# Altium PCB electronic_dc_load_v2.PcbDoc (part 3 of 3)
Units mm, origin at the board's own origin, x right, y up, seen from the top; angles counter-clockwise.
Board outline 170 x 170 mm, 4 copper layers (Top Layer, Int1(GND), Int2, Bottom Layer(PWR)), stack 1.607 mm thick; 162 components, 115 nets, 479 pads, 0 vias.
Unrouted connection lines stored in the file: 311.
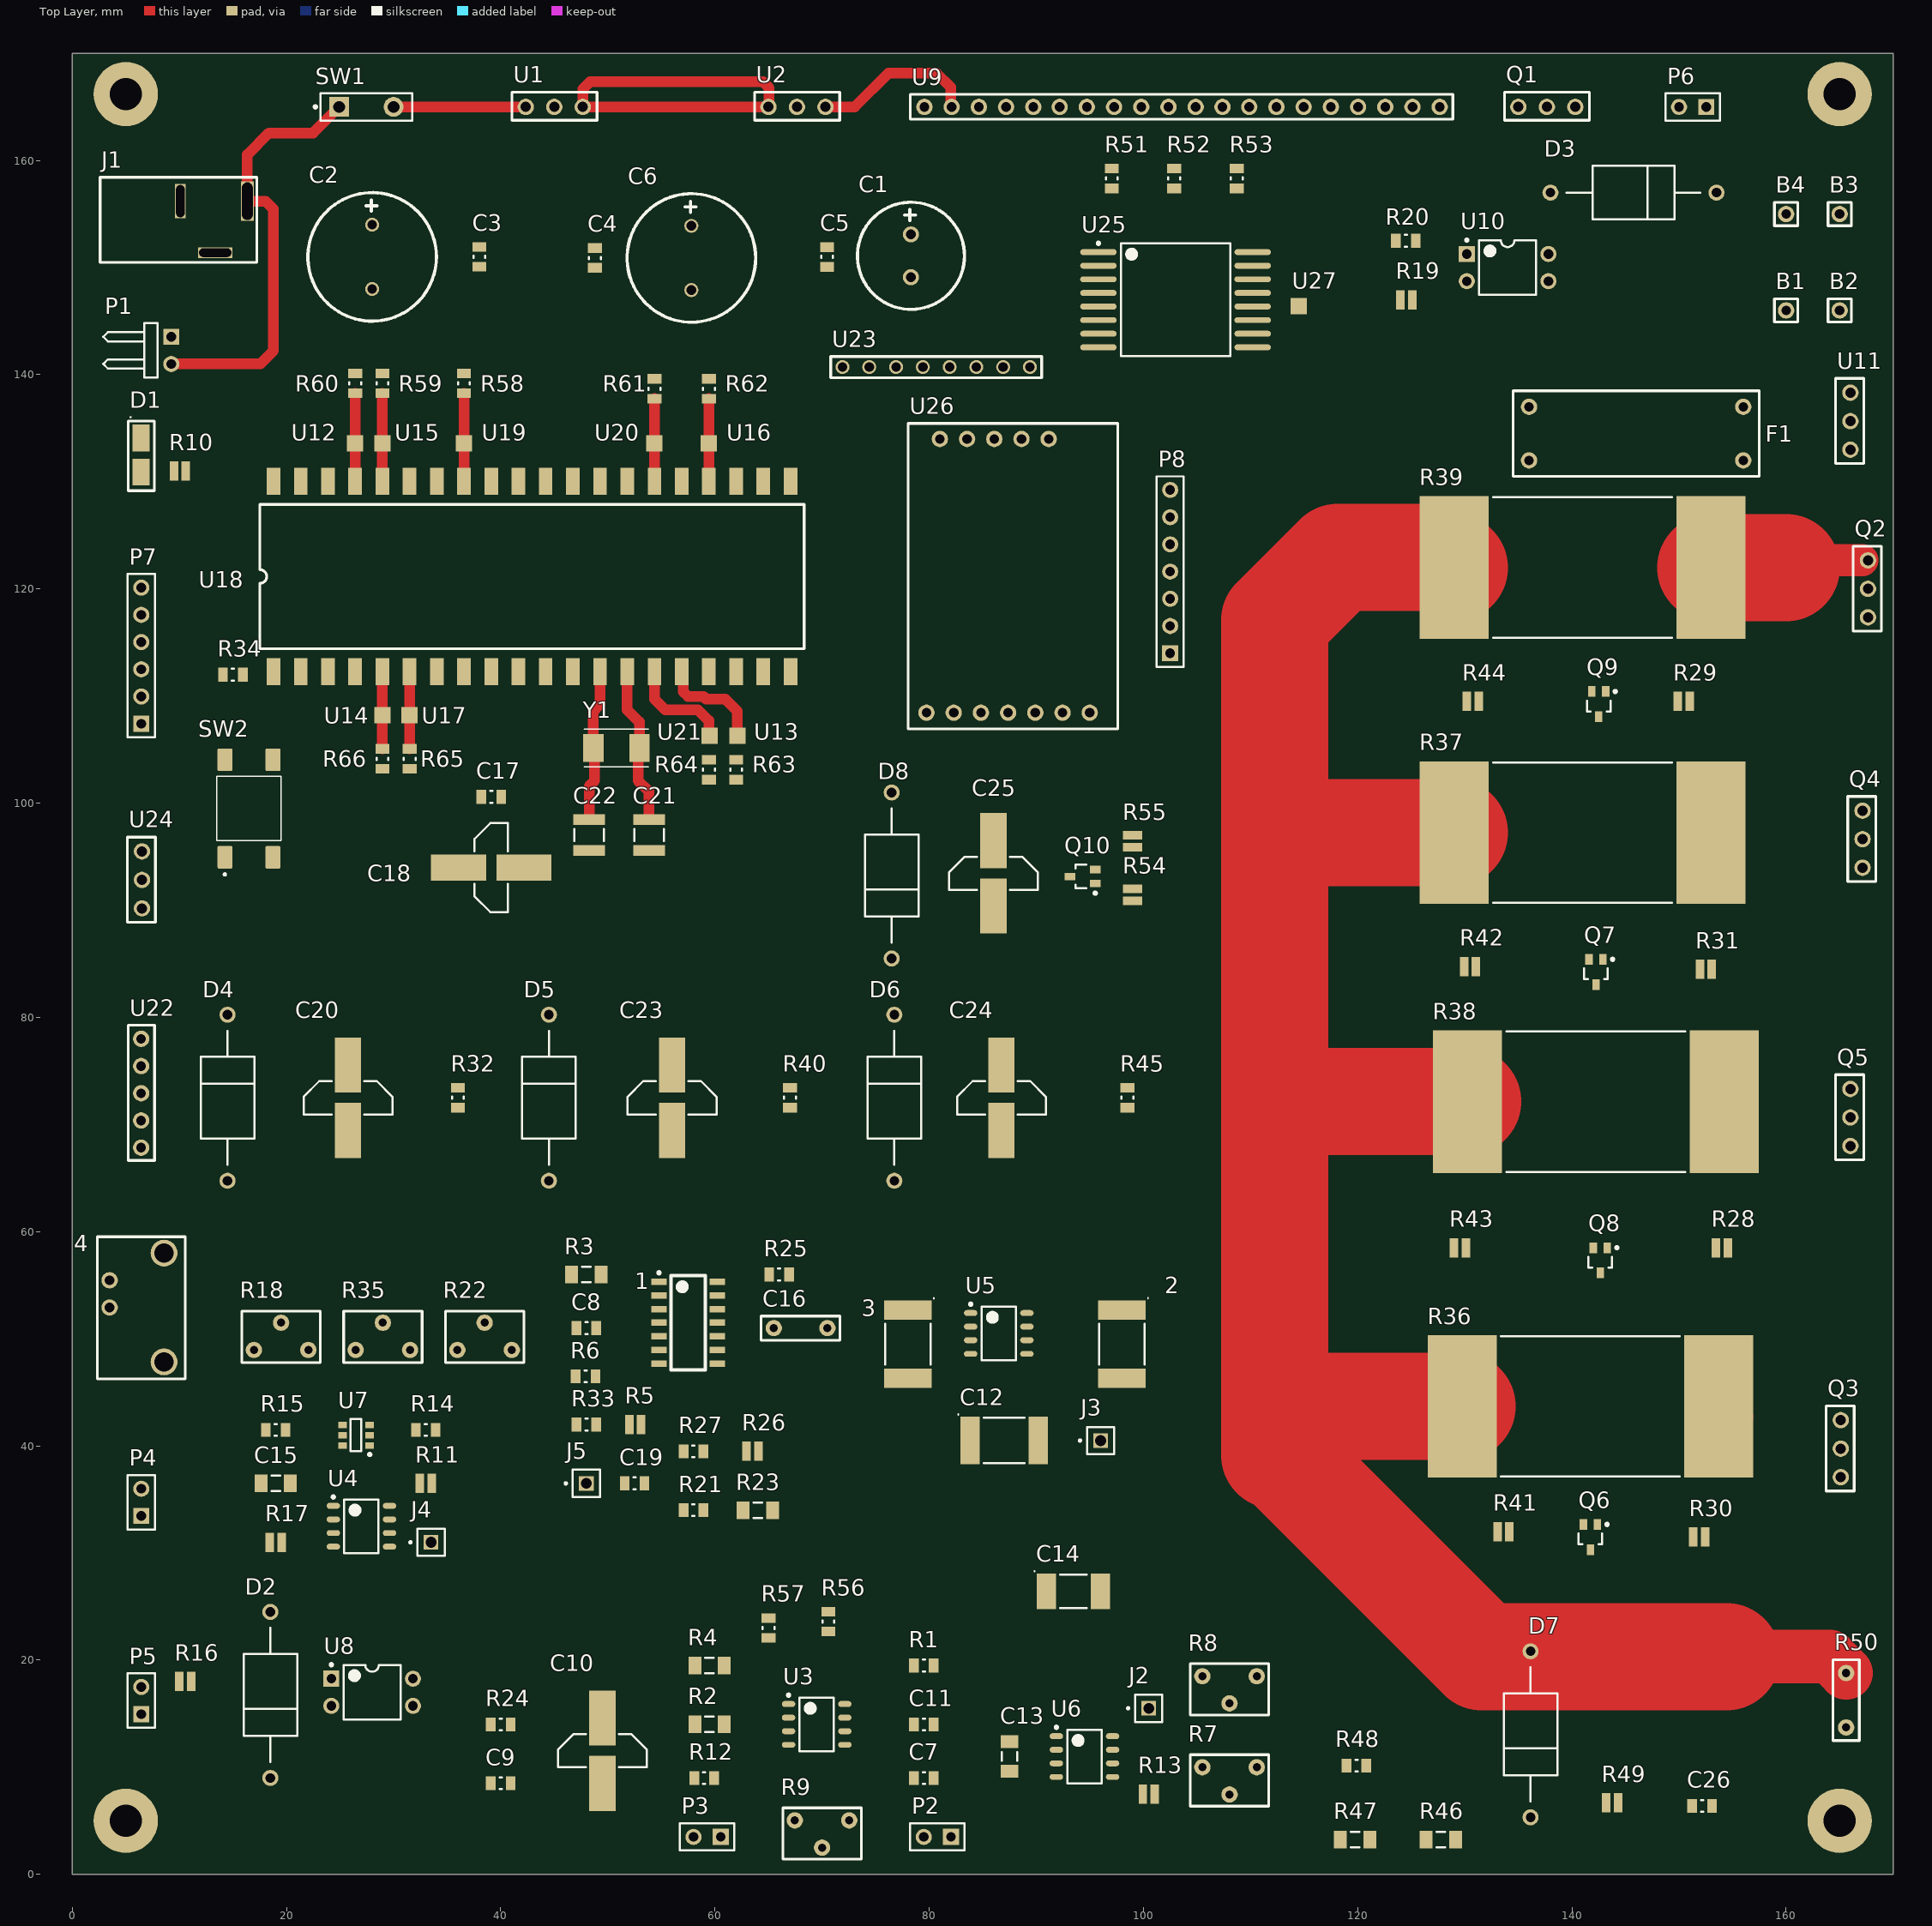
[diagram p0: Top Layer view]

## Nets (pads, with @x,y where several pads share a name; then routed paths per layer and width w, separated by ;. In a path a pad name is that pad's centre, name@x,y a point inside that pad or via, vN(x,y) a via of type N, cw(c..) or ccw(c..) an arc to the next point about the centre after c; other vN are vias at no path point) (continued)
NetQ3_3: (continued)
  Top Layer w5: R36.2 153.707,43.397 R36.2@154.432,42.672
NetQ4_1: Q4.1 Q7.3 R31.1
NetQ4_3: Q4.3 Q7.1 R37.2
NetQ5_1: Q5.1 Q8.3 R28.1
NetQ5_3: Q5.3 Q8.1 R38.2
NetQ6_2: Q6.2 R41.2
NetQ7_2: Q7.2 R42.2
NetQ8_2: Q8.2 R43.2
NetQ9_2: Q9.2 R44.2
NetQ10_2: Q10.2 R55.2
NetR1_1: R1.1 R56.2
NetR1_2: R1.2 R4.1 U3.2
NetR2_1: R2.1 R12.2 U3.3
NetR7_2: R7.2 R8.2 R13.2
NetR9_1: R9.1 U3.1
NetR9_3: R9.3 U3.8
NetR12_1: R12.1 R57.2
NetR13_1: R13.1 U6.5
NetR14_1: R14.1 U7.3 U7.6 U18.35
NetR19_1: R19.1 U10.4
NetR20_2: R20.2 U10.1
NetR22_2: R22.2 R23.1
NetR24_1: R24.1 U9.19
NetR26_2: R26.2 R28.2 R29.2 R30.2 R31.2
NetR27_1: R27.1 U18.34
NetR33_1: R33.1 R35.1
NetR46_2: R46.2 R47.1
NetR51_1: R51.1 U18.18 U25.14 U26.5
NetR52_1: R52.1 U18.23 U25.15 U26.4
NetR53_1: R53.1 U18.17 U25.13
NetU10_2: U10.2 U18.7
NetU18_10: U18.10 U24.2
NetU18_19: U18.19 U23.1
NetU18_20: U18.20 U23.2
NetU18_21: U18.21 U23.3
NetU18_22: U18.22 U23.4
NetU18_27: U18.27 U23.5
NetU18_28: U18.28 U23.6
NetU18_29: U18.29 U23.7
NetU18_30: U18.30 U23.8
NetU25_12: U25.12 U27.1
RS: U9.4 U25.4
RST: U9.17 U25.6
TP1: R66.1 U14.1 U18.5 | length 7.2
  Top Layer w1: R66.1 U14.1 U18.5
TP2: R65.1 U17.1 U18.6 | length 7.2
  Top Layer w1: R65.1 U17.1 U18.6
TP3: R64.1 U18.15 U21.1 | length 9.9
  Top Layer w1: U18.15 54.356,109.728 55.372,108.712 58.42,108.712 59.436,107.696 59.436,106.364 U21.1
TP4: R63.1 U13.1 U18.16 | length 10
  Top Layer w1: U18.16 57.031,112.133 57.031,110.417 57.482,109.966 58.939,109.966 59.177,109.728 60.96,109.728 62.1,108.588 U13.1
TP5: R62.1 U16.1 U18.24 | length 7.7
  Top Layer w1: U18.24 U16.1 R62.1
TP6: R61.1 U18.26 U20.1 | length 7.7
  Top Layer w1: U18.26 U20.1 R61.1
TP7: R60.1 U12.1 U18.37 | length 8.2
  Top Layer w1: U18.37 U12.1 R60.1
TP8: R59.1 U15.1 U18.36 | length 8.2
  Top Layer w1: U18.36 U15.1 R59.1
TP9: R58.1 U18.33 U19.1 | length 8.2
  Top Layer w1: U18.33 U19.1 R58.1
pads on no net: 1.8 1.9 1.10 4.3 4.4 U3.5 U4.4 U4.5 U5.1 U5.6 U6.1 U6.3 U6.7 U6.8 U9.3 U9.16 U9.18 U26.6